# Altium PCB KZ-EC06-LED-V1.2.PcbDoc
Units mm, origin at the board's own origin, x right, y up, seen from the top; angles counter-clockwise.
Board outline 130 x 130 mm, 2 copper layers (Top Layer, Bottom Layer), stack 1.569 mm thick; 41 components, 40 nets, 122 pads, 372 vias.
Unrouted connection lines stored in the file: 1.
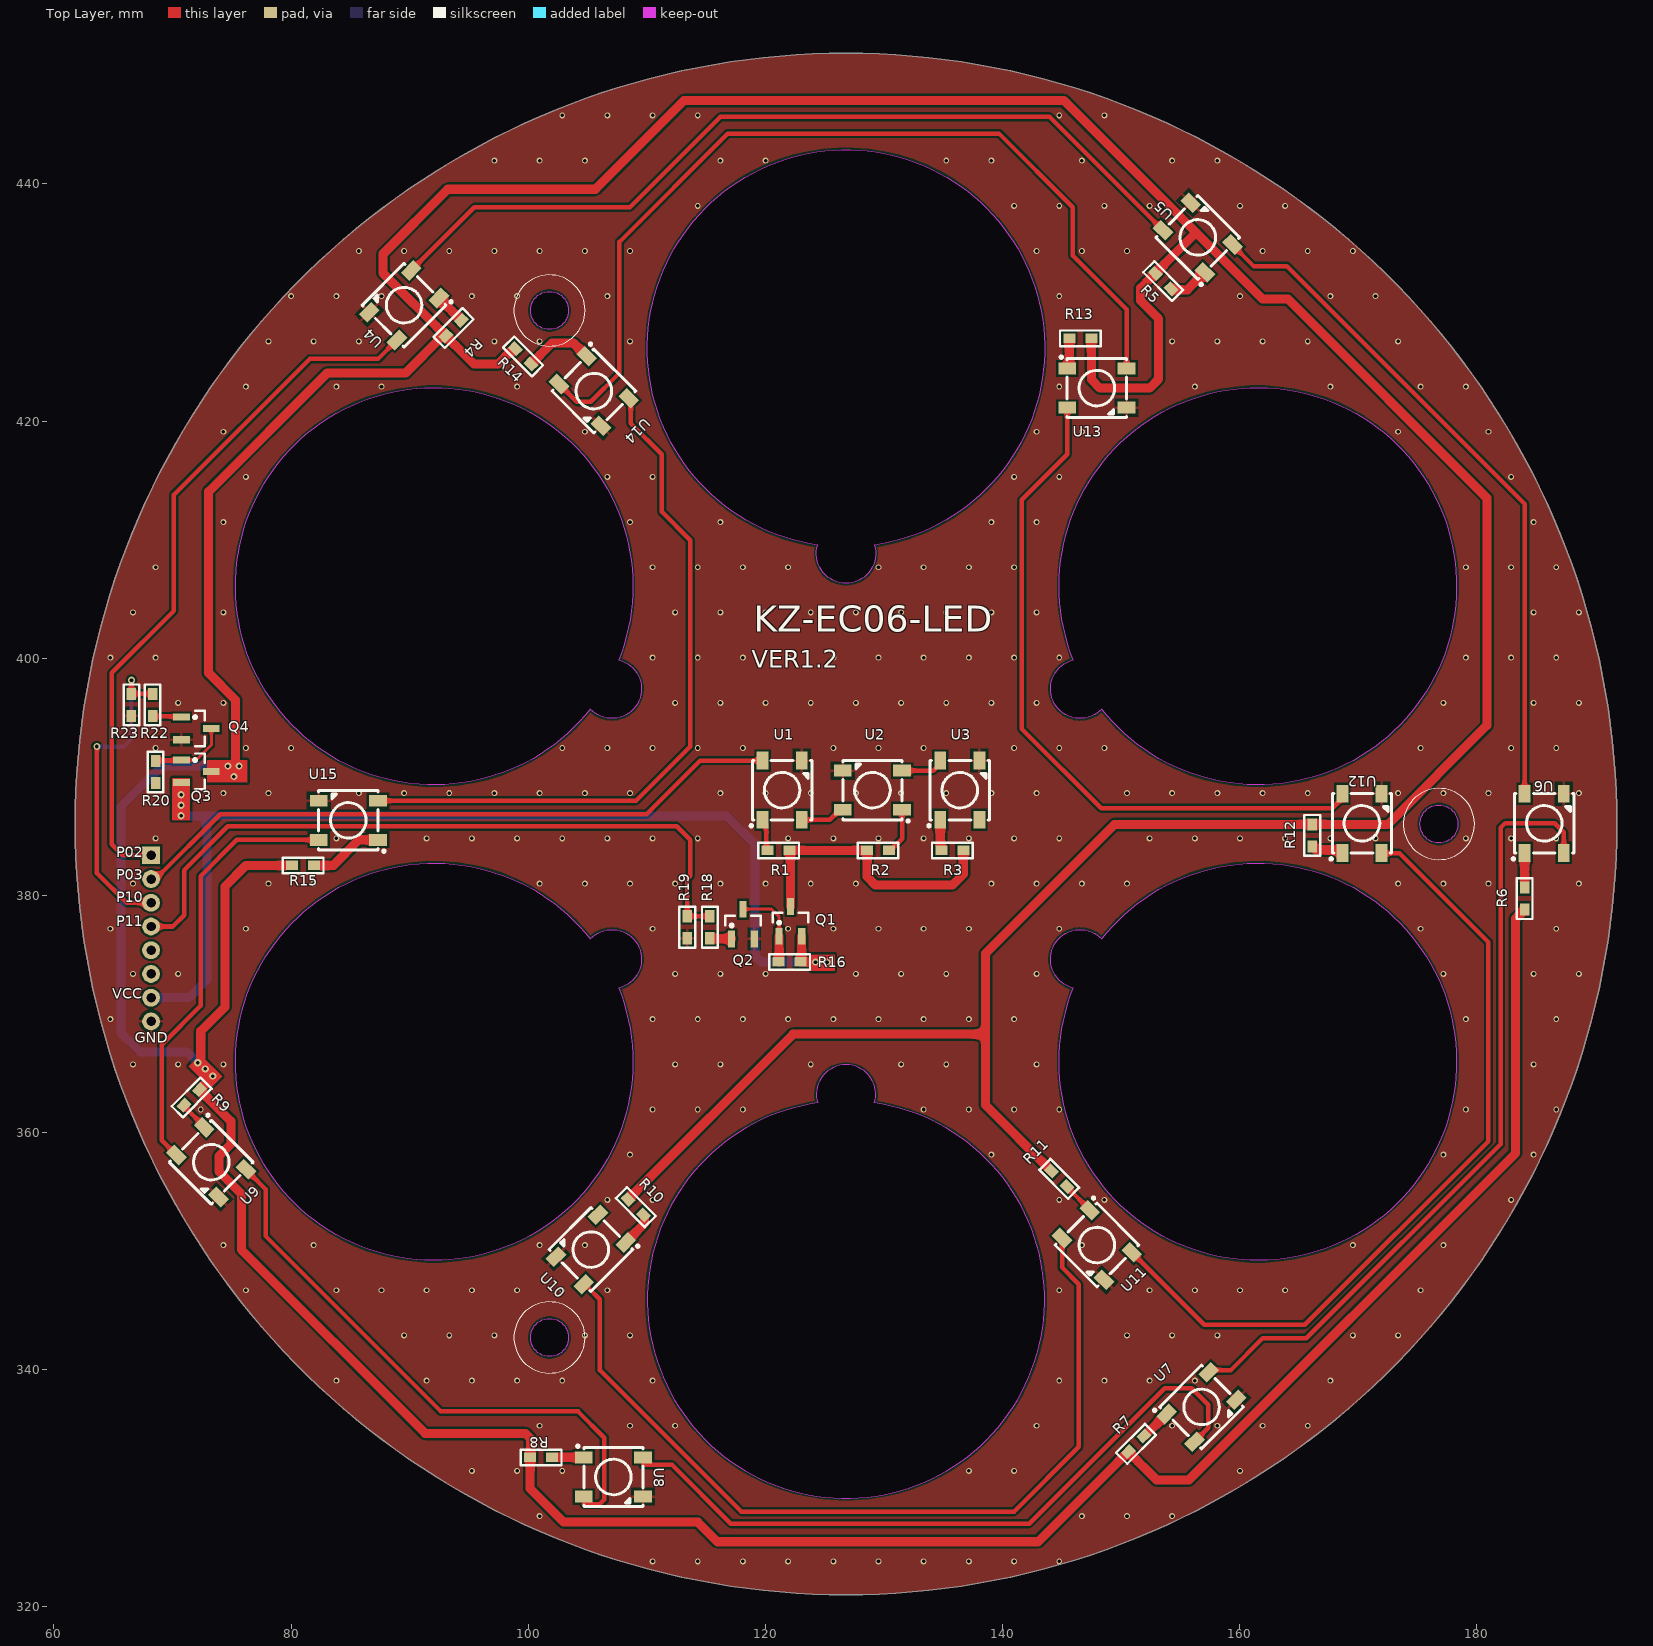
[diagram p0: Top Layer view]
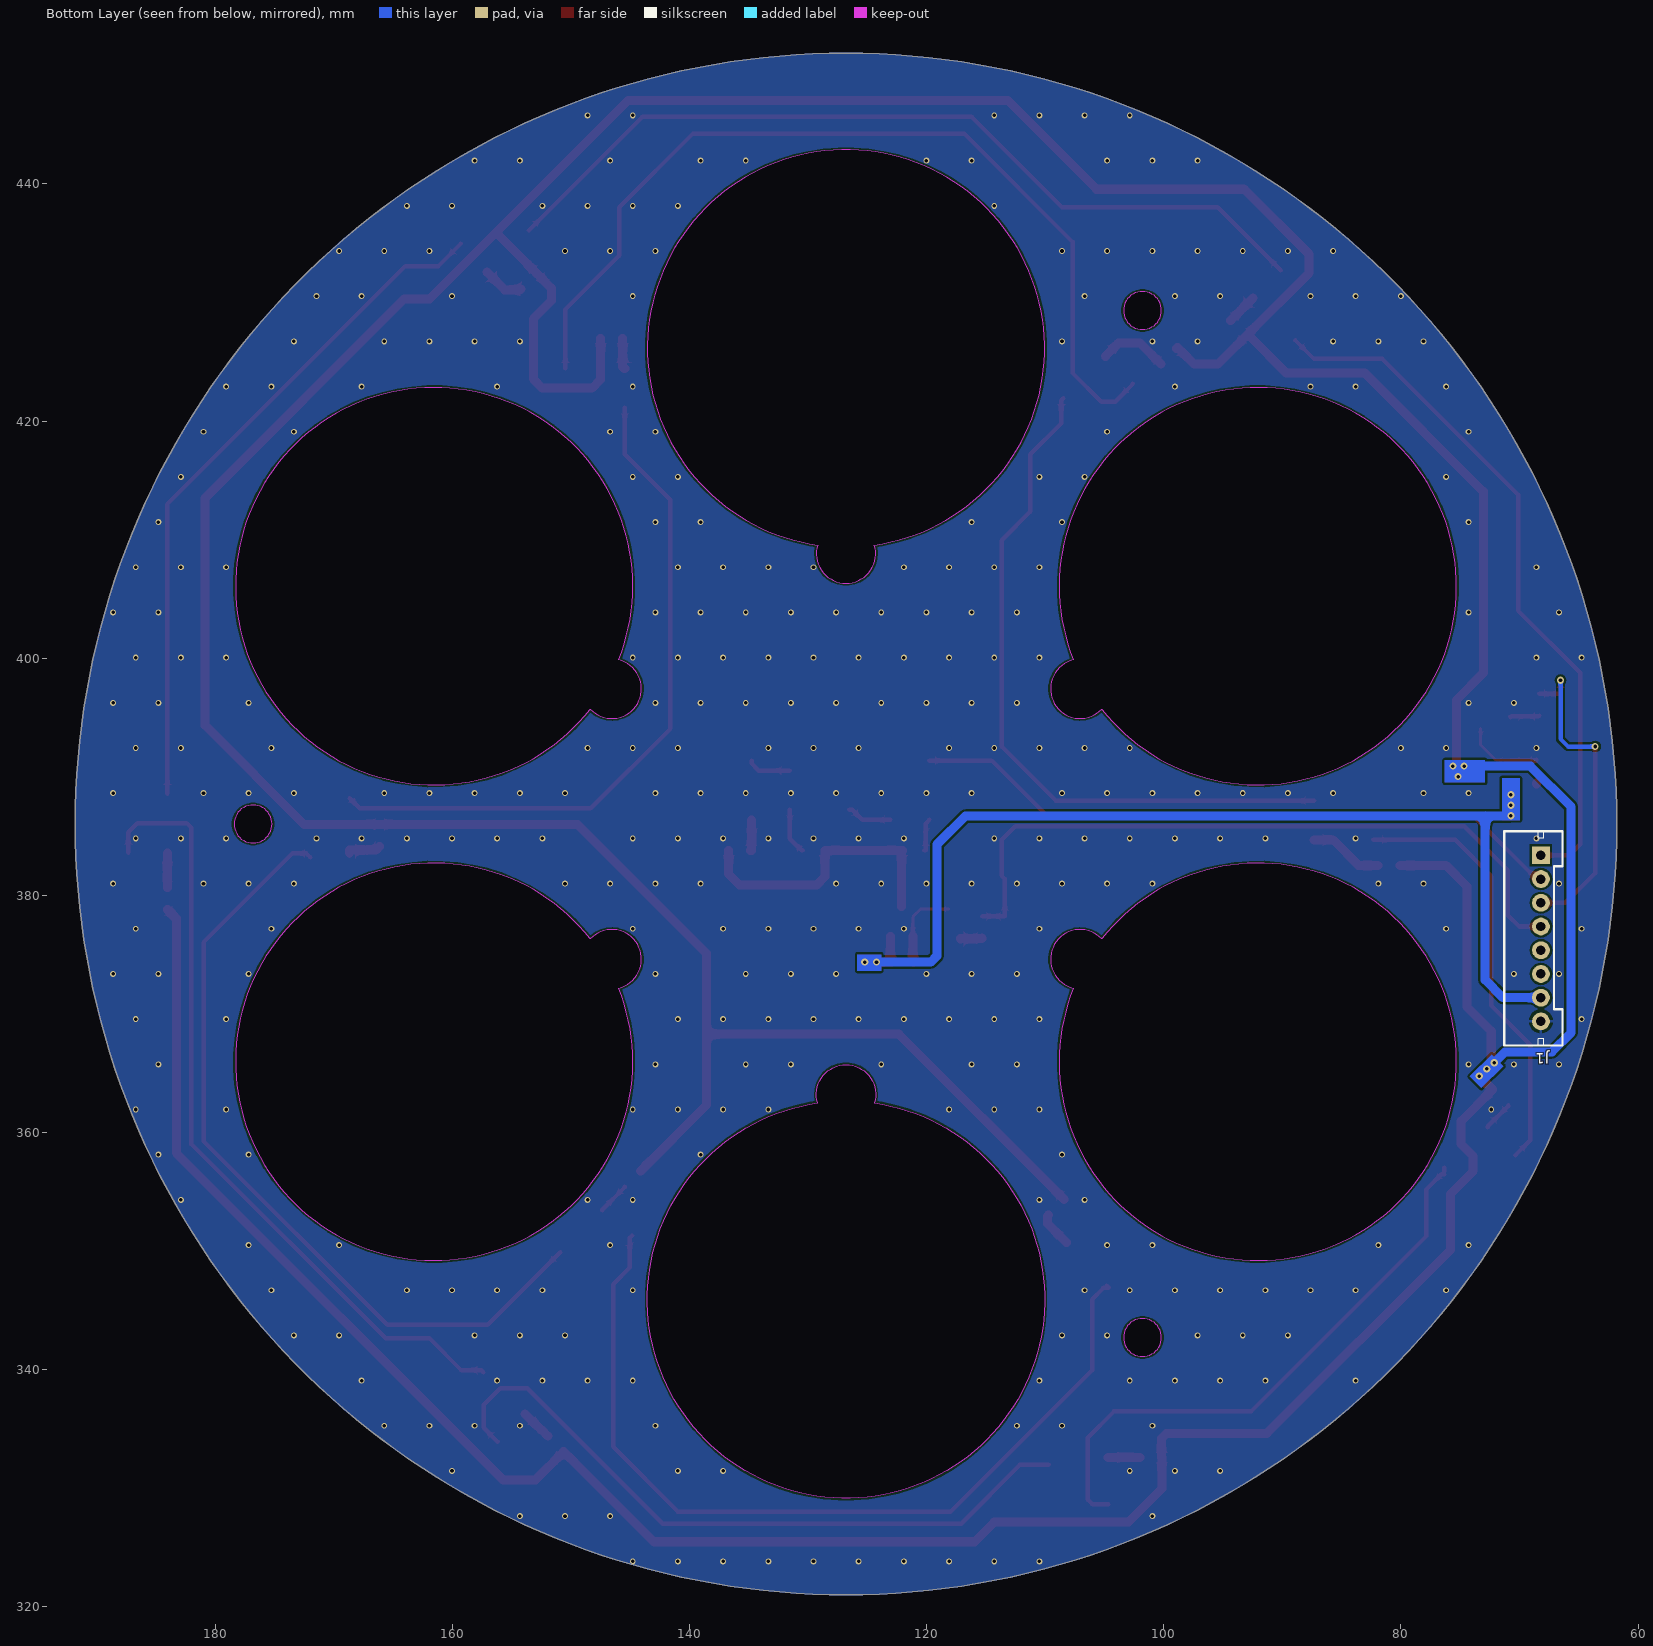
[diagram p1: Bottom Layer view, seen from below]
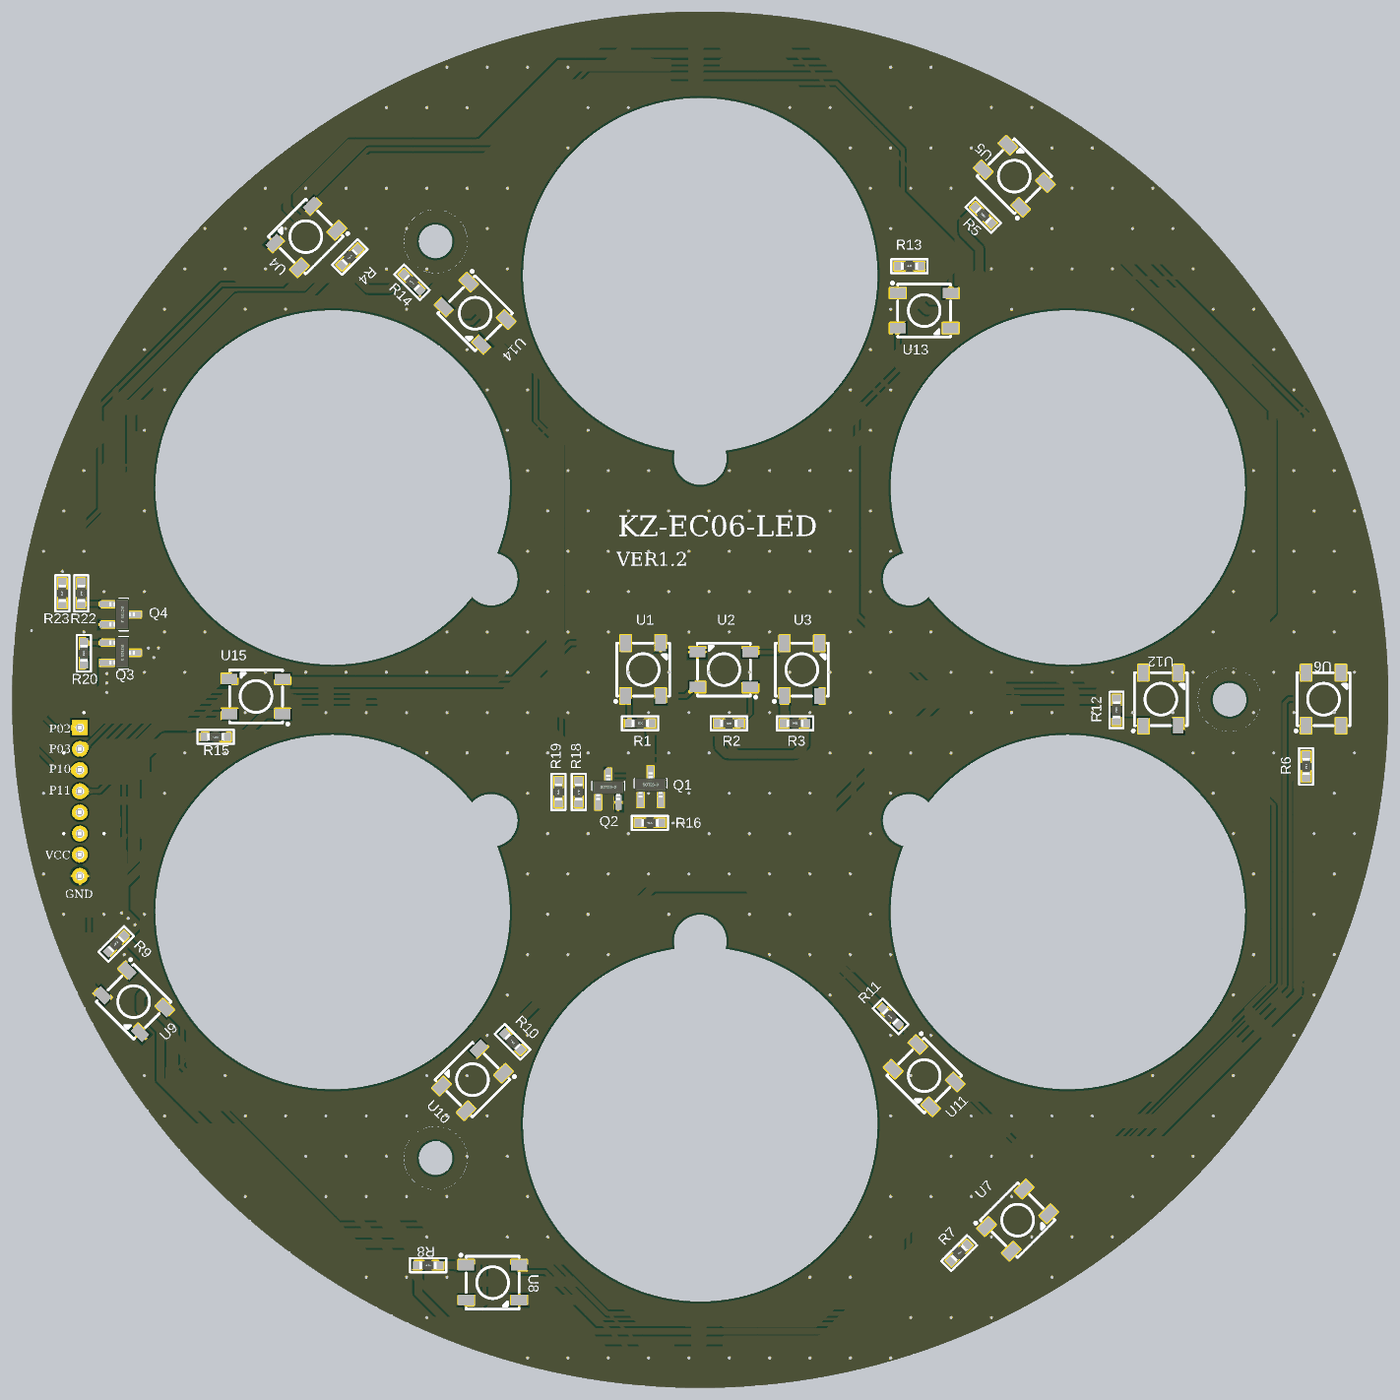
[diagram p2: 3D render of the assembled board from above, using the file's embedded part models]

## Layer stack, top to bottom
Top Solder: solder mask 0.0254, SM-001, Dk 4
Top Layer: signal copper 0.035
Dielectric 1: core 1.4986, Core-043, Dk 4.3
Bottom Layer: signal copper 0.035
Bottom Solder: solder mask 0.0254, SM-001, Dk 4

## Board outline
126.799,321.023 cw(c126.799,386.023) 61.799,386.023 cw(c126.799,386.023) 126.799,451.023 cw(c126.799,386.023) 191.799,386.023 cw(c126.799,386.023)
cut-out: 101.799,427.724 cw(c101.799,429.324) 100.199,429.324 cw(c101.799,429.324) 101.799,430.924 cw(c101.799,429.324) 103.399,429.324 cw(c101.799,429.324)
cut-out: 100.199,342.722 cw(c101.799,342.722) 101.799,344.322 cw(c101.799,342.722) 103.399,342.722 cw(c101.799,342.722) 101.799,341.122 cw(c101.799,342.722)
cut-out: 176.799,384.423 cw(c176.799,386.023) 175.199,386.023 cw(c176.799,386.023) 176.799,387.623 cw(c176.799,386.023) 178.399,386.023 cw(c176.799,386.023)
cut-out: 107.625,372.189 cw(c92.071,365.973) 105.232,376.335 cw(c107.053,374.623)
cut-out: 105.232,395.711 cw(c92.071,406.073) 107.625,399.857 cw(c107.053,397.423)
cut-out: 124.405,409.545 cw(c126.799,426.123) 129.192,409.545 cw(c126.799,408.823)
cut-out: 148.366,395.711 cw(c146.544,397.423) 145.973,399.857 cw(c161.526,406.073)
cut-out: 145.973,372.189 cw(c146.544,374.623) 148.366,376.335 cw(c161.526,365.973)
cut-out: 124.405,362.501 ccw(c126.799,345.923) 129.192,362.501 ccw(c126.799,363.223)

## Design rules (kind name [scope] priority, off if disabled: settings)
Clearance [All] p1: gap=0.178 ignorepadtopadclearanceinfootprint=FALSE
HoleToHoleClearance [All] p1: gap=0 allowstackedmicrovias=TRUE
MinimumSolderMaskSliver [All] p1: minsoldermaskwidth=0
PlaneConnect [All] p1: pad.planeconnectstyle=Relief pad.reliefexpansion=0.508 pad.reliefentries=4 pad.reliefconductorwidth=0.254 pad.reliefairgap=0.254 via.planeconnectstyle=Direct via.reliefexpansion=0.508 via.reliefentries=4 via.reliefconductorwidth=0.254 via.reliefairgap=0.254
PolygonConnect [All] p1: thpad.connectstyle=Relief thpad.reliefconductorwidth=0.254 thpad.reliefentries=4 thpad.polygonreliefangle="90 Angle" thpad.airgapwidth=0.254 smdpad.connectstyle=Relief smdpad.reliefconductorwidth=0.254 smdpad.reliefentries=4 smdpad.polygonreliefangle="90 Angle" smdpad.airgapwidth=0.254 via.connectstyle=Direct via.reliefconductorwidth=0.254 via.reliefentries=4 via.polygonreliefangle="90 Angle" via.airgapwidth=0.254
RoutingVias [All] p1: holewidth=0.711 width=1.27 viastyle="Through Hole" minholewidth=0.711 minwidth=1.27 maxholewidth=0.711 maxwidth=1.27
SilkToSilkClearance [All] p1: silktosilkclearance=0
SilkToSolderMaskClearance [IsPad] p1: minsilkscreentomaskgap=0 clearancetoexposedcopper=TRUE
SolderMaskExpansion [All] p1: expansion=0.102 istentingtop=FALSE
Width [All] p1: maxlimit=1.524 minlimit=0.254 preferedwidth=0.254
25 further rules are at their usual default settings.

## Components (designator, comment, footprint, x,y, rotation, side; value= is the part's Value field where it differs from the comment)
J1 "PH2.0-8P" PH2.0-8P 68.199,383.38 r270 bottom
Q1 "P-MOS" SOT23 121.163,376.555 r0 top
Q2 "2302 NMOS" SOT23 117.16,376.327 r0 top
Q3 "P-MOS" SOT23 70.765,391.414 r270 top
Q4 "2302 NMOS" SOT23 70.765,395.031 r270 top
R1 "240R 0603" "R 0603" 121.12,383.794 r0 top
R2 "240R 0603" "R 0603" 129.502,383.794 r180 top
R3 "240R 0603" "R 0603" 135.763,383.794 r0 top
R4 "240R 0603" "R 0603" 93.705,427.842 r225 top
R5 "240R 0603" "R 0603" 153.543,431.8 r135 top
R6 "240R 0603" "R 0603" 184.023,379.73 r270 top
R7 "240R 0603" "R 0603" 151.257,333.756 r225 top
R8 "240R 0603" "R 0603" 101.092,332.613 r180 top
R9 "240R 0603" "R 0603" 71.628,362.966 r45 top
R10 "240R 0603" "R 0603" 109.072,353.716 r135 top
R11 "240R 0603" "R 0603" 144.78,356.108 r135 top
R12 "240R 0603" "R 0603" 166.116,385.064 r90 top
R13 "240R 0603" "R 0603" 146.558,426.974 r0 top
R14 "240R 0603" "R 0603" 99.568,425.45 r135 top
R15 "240R 0603" "R 0603" 81.026,382.524 r180 top
R16 "10K" "R 0603" 122.047,374.396 r0 top
R18 "100K 0402 5%" "R 0603" 115.316,377.317 r270 top
R19 "100K 0402 5%/NC" "R 0603" 113.411,377.317 r90 top
R20 "10K" "R 0603" 68.58,390.414 r270 top
R22 "100K 0402 5%" "R 0603" 68.326,396.075 r270 top
R23 "100K 0402 5%/NC" "R 0603" 66.548,396.075 r90 top
U1 "LED-IC" LED-SMD_4P-L5.0-W5.0-BL_TC5050RGB 121.412,388.874 r90 top
U2 "LED-IC" LED-SMD_4P-L5.0-W5.0-BL_TC5050RGB 129.032,388.874 r180 top
U3 "LED-IC" LED-SMD_4P-L5.0-W5.0-BL_TC5050RGB 136.398,388.874 r90 top
U4 "LED-IC" LED-SMD_4P-L5.0-W5.0-BL_TC5050RGB 89.535,429.768 r225 top
U5 "LED-IC" LED-SMD_4P-L5.0-W5.0-BL_TC5050RGB 156.464,435.483 r135 top
U6 "LED-IC" LED-SMD_4P-L5.0-W5.0-BL_TC5050RGB 185.674,386.08 r90 top
U7 "LED-IC" LED-SMD_4P-L5.0-W5.0-BL_TC5050RGB 156.781,336.868 r45 top
U8 "LED-IC" LED-SMD_4P-L5.0-W5.0-BL_TC5050RGB 107.188,330.962 r0 top
U9 "LED-IC" LED-SMD_4P-L5.0-W5.0-BL_TC5050RGB 73.279,357.505 r315 top
U10 "LED-IC" LED-SMD_4P-L5.0-W5.0-BL_TC5050RGB 105.283,350.139 r225 top
U11 "LED-IC" LED-SMD_4P-L5.0-W5.0-BL_TC5050RGB 147.955,350.52 r315 top
U12 "LED-IC" LED-SMD_4P-L5.0-W5.0-BL_TC5050RGB 170.307,386.08 r90 top
U13 "LED-IC" LED-SMD_4P-L5.0-W5.0-BL_TC5050RGB 147.955,422.783 r0 top
U14 "LED-IC" LED-SMD_4P-L5.0-W5.0-BL_TC5050RGB 105.537,422.529 r315 top
U15 "LED-IC" LED-SMD_4P-L5.0-W5.0-BL_TC5050RGB 84.836,386.334 r180 top

## Footprints (in the part's own frame and the unit in brackets; to place one, negate y for a bottom-side part, rotate by r counter-clockwise, add the part's x,y. Pads: shape width x height; smd on the part's side, far side on the other; paste and mask are expansions set on the pad)
LED-SMD_4P-L5.0-W5.0-BL_TC5050RGB [mm]
  rect 1.5x1 smd: 1(-2.5,1.65) 2(-2.5,-1.65) 3(2.5,-1.65) 4(2.5,1.65)
  silkscreen extent -3.1,-2.5 2.5,2.7
PH2.0-8P [mm]
  rect 1.5x1.5 hole 0.8: 1(0,0)
  round 1.5 hole 0.8: 2(2,0) 3(4,0) 4(6,0) 5(8,0) 6(10,0) 7(12,0) 8(14,0)
  silkscreen extent -2.03,-3.08 16.03,1.82, body extent -1.96,-2.99 15.94,1.71, height 6.01
"R 0603" [mil] "1/10W贴片电阻"
  rect 40x31.5 smd: 1(-36.5,0) 2(36.5,0)
  silkscreen extent -68,-26 68,26, body extent -31,-16 32,16, height 16
SOT23 [mm]
  rect 0.6x1.4 smd: D(0.95,2.514) G(0,0) S(1.9,0)
  silkscreen extent -0.55,1.02 2.45,1.97, body extent -0.56,0.22 2.44,2.62, height 1.05

## Part data
Q1 Q3: "P沟道场效应管"
Q2 Q4: library part N-MOS, "N沟道场效应管"
R1 R2 R3 R4 R5 R6 R7 R8 R9 R10 R11 R12 R13 R14 R15 R16 R18 R19 R20 R22 R23: library part R, "贴片电阻", BOM名称=贴片电阻, 学习资源=www.ooocke.com, 版权归属=源创客
U1 U2 U3 U4 U5 U6 U7 U8 U9 U10 U11 U12 U13 U14 U15: library part TC5050RGB

## Via types
v1: diameter 0.5, hole 0.3, Top Layer to Bottom Layer, tented both sides, 359 vias
v2: diameter 0.6, hole 0.3, Top Layer to Bottom Layer, tented both sides, 13 vias

## Nets (pads, with @x,y where several pads share a name; then routed paths per layer and width w, separated by ;. In a path a pad name is that pad's centre, name@x,y a point inside that pad or via, vN(x,y) a via of type N, cw(c..) or ccw(c..) an arc to the next point about the centre after c; other vN are vias at no path point)
GND: J1.8 Q2.S Q4.S R19.1 R23.1 U1.3 U2.3 U3.3 U4.3 U5.3 U6.3 U7.3 U8.3 U9.3 U10.3 U11.3 U12.3 U13.3 U14.3 U15.3
  other v1: 110.49,323.85 114.3,323.85 118.11,323.85 121.92,323.85 125.73,323.85 129.54,323.85 133.35,323.85 137.16,323.85 140.97,323.85 144.78,323.85 100.965,327.66 146.685,327.66 150.495,327.66 154.305,327.66 95.25,331.47 99.06,331.47 102.87,331.47 137.16,331.47 140.97,331.47 160.02,331.47 100.965,335.28 108.585,335.28 112.395,335.28 142.875,335.28 154.305,335.28 158.115,335.28 161.925,335.28 165.735,335.28 83.82,339.09 91.44,339.09 95.25,339.09 99.06,339.09 102.87,339.09 110.49,339.09 144.78,339.09 148.59,339.09 152.4,339.09 156.21,339.09 167.64,339.09 89.535,342.9 93.345,342.9 97.155,342.9 104.775,342.9 108.585,342.9 150.495,342.9 154.305,342.9 158.115,342.9 169.545,342.9 173.355,342.9 76.2,346.71 83.82,346.71 87.63,346.71 91.44,346.71 95.25,346.71 99.06,346.71 102.87,346.71 106.68,346.71 144.78,346.71 152.4,346.71 156.21,346.71 160.02,346.71 163.83,346.71 175.26,346.71 74.295,350.52 81.915,350.52 100.965,350.52 104.775,350.52 146.685,350.52 169.545,350.52 177.165,350.52 106.68,354.33 110.49,354.33 144.78,354.33 148.59,354.33 182.88,354.33 108.585,358.14 139.065,358.14 177.165,358.14 184.785,358.14 72.39,361.95 110.49,361.95 114.3,361.95 118.11,361.95 133.35,361.95 137.16,361.95 140.97,361.95 144.78,361.95 179.07,361.95 186.69,361.95 66.675,365.76 70.485,365.76 74.295,365.76 112.395,365.76 116.205,365.76 123.825,365.76 131.445,365.76 135.255,365.76 142.875,365.76 184.785,365.76 64.77,369.57 110.49,369.57 114.3,369.57 118.11,369.57 121.92,369.57 125.73,369.57 129.54,369.57 133.35,369.57 137.16,369.57 140.97,369.57 179.07,369.57 186.69,369.57 66.675,373.38 70.485,373.38 112.395,373.38 116.205,373.38 120.015,373.38 127.635,373.38 131.445,373.38 135.255,373.38 142.875,373.38 177.165,373.38 184.785,373.38 188.595,373.38 64.77,377.19 76.2,377.19 110.49,377.19 121.92,377.19 125.73,377.19 129.54,377.19 133.35,377.19 137.16,377.19 144.78,377.19 175.26,377.19 186.69,377.19 66.675,381 78.105,381 81.915,381 100.965,381 104.775,381 108.585,381 112.395,381 116.205,381 120.015,381 123.825,381 127.635,381 139.065,381 142.875,381 146.685,381 150.495,381 173.355,381 177.165,381 180.975,381 188.595,381 68.58,384.81 83.82,384.81 91.44,384.81 95.25,384.81 99.06,384.81 102.87,384.81 106.68,384.81 110.49,384.81 114.3,384.81 121.92,384.81 125.73,384.81 129.54,384.81 133.35,384.81 137.16,384.81 140.97,384.81 144.78,384.81 152.4,384.81 156.21,384.81 160.02,384.81 163.83,384.81 167.64,384.81 171.45,384.81 179.07,384.81 182.88,384.81 186.69,384.81 74.295,388.62 78.105,388.62 85.725,388.62 89.535,388.62 93.345,388.62 97.155,388.62 100.965,388.62 104.775,388.62 108.585,388.62 116.205,388.62 120.015,388.62 123.825,388.62 127.635,388.62 131.445,388.62 135.255,388.62 139.065,388.62 142.875,388.62 150.495,388.62 154.305,388.62 158.115,388.62 161.925,388.62 165.735,388.62 173.355,388.62 177.165,388.62 180.975,388.62 188.595,388.62 68.58,392.43 76.2,392.43 80.01,392.43 102.87,392.43 106.68,392.43 110.49,392.43 114.3,392.43 118.11,392.43 125.73,392.43 129.54,392.43 133.35,392.43 140.97,392.43 144.78,392.43 148.59,392.43 175.26,392.43 182.88,392.43 186.69,392.43 70.485,396.24 74.295,396.24 112.395,396.24 116.205,396.24 120.015,396.24 123.825,396.24 127.635,396.24 131.445,396.24 135.255,396.24 139.065,396.24 142.875,396.24 177.165,396.24 184.785,396.24 188.595,396.24 64.77,400.05 68.58,400.05 110.49,400.05 114.3,400.05 118.11,400.05 121.92,400.05 125.73,400.05 129.54,400.05 133.35,400.05 137.16,400.05 140.97,400.05 144.78,400.05 179.07,400.05 182.88,400.05 186.69,400.05 66.675,403.86 74.295,403.86 112.395,403.86 116.205,403.86 120.015,403.86 123.825,403.86 127.635,403.86 131.445,403.86 135.255,403.86 139.065,403.86 142.875,403.86 184.785,403.86 188.595,403.86 68.58,407.67 110.49,407.67 114.3,407.67 118.11,407.67 121.92,407.67 129.54,407.67 133.35,407.67 137.16,407.67 140.97,407.67 179.07,407.67 182.88,407.67 186.69,407.67 74.295,411.48 108.585,411.48 116.205,411.48 139.065,411.48 142.875,411.48 184.785,411.48 76.2,415.29 106.68,415.29 110.49,415.29 140.97,415.29 144.78,415.29 182.88,415.29 74.295,419.1 104.775,419.1 142.875,419.1 146.685,419.1 173.355,419.1 180.975,419.1 76.2,422.91 83.82,422.91 87.63,422.91 99.06,422.91 144.78,422.91 156.21,422.91 167.64,422.91 175.26,422.91 179.07,422.91 78.105,426.72 81.915,426.72 85.725,426.72 97.155,426.72 100.965,426.72 108.585,426.72 154.305,426.72 158.115,426.72 161.925,426.72 165.735,426.72 173.355,426.72 80.01,430.53 83.82,430.53 87.63,430.53 95.25,430.53 99.06,430.53 106.68,430.53 144.78,430.53 160.02,430.53 167.64,430.53 171.45,430.53 85.725,434.34 89.535,434.34 93.345,434.34 97.155,434.34 100.965,434.34 104.775,434.34 108.585,434.34 142.875,434.34 146.685,434.34 150.495,434.34 161.925,434.34 165.735,434.34 169.545,434.34 114.3,438.15 140.97,438.15 144.78,438.15 148.59,438.15 152.4,438.15 160.02,438.15 163.83,438.15 97.155,441.96 100.965,441.96 104.775,441.96 116.205,441.96 120.015,441.96 135.255,441.96 139.065,441.96 146.685,441.96 154.305,441.96 158.115,441.96 102.87,445.77 106.68,445.77 110.49,445.77 114.3,445.77 144.78,445.77 148.59,445.77
NetQ1_G: Q1.G Q2.D R16.1 | length 7.2
  Top Layer w0.254: Q2.D 120.523,378.841 121.163,378.201 Q1.G
  Top Layer w0.762: R16.1 121.144,374.396 121.163,374.415 Q1.G
NetQ2_G: Q2.G R18.2 | length 1.9
  Top Layer w0.762: R18.2 115.316,376.377 115.335,376.358 117.128,376.358 Q2.G
NetQ3_G: Q3.G Q4.D R20.1 | length 6.8
  Top Layer w0.254: Q3.G 72.009,391.414 73.279,392.684 Q4.D
  Top Layer w0.381: R20.1@68.58,391.449 R20.1 68.616,391.377 70.729,391.377 Q3.G
NetQ4_G: Q4.G R22.2 | length 2.5
  Top Layer w0.381: R22.2 68.384,395.089 70.707,395.089 Q4.G Q4.G@70.79,395.056
NetR1_1: R1.1 U1.1 | length 2.8
  Top Layer w0.381: U1.1 120.085,386.051 120.085,383.794 R1.1
NetR2_1: R2.1 U2.1 | length 4
  Top Layer w0.381: R2.1 130.537,383.794 131.532,384.789 U2.1
NetR3_1: R3.1 U3.1 | length 2.7
  Top Layer w0.762: U3.1 134.748,383.813 134.767,383.794 R3.1
NetR4_1: R4.1 U4.1 | length 2.8
  Top Layer w0.381: R4.1 R4.1@94.528,428.498
  Top Layer w0.762: U4.1 92.48,430.369 94.351,428.498 R4.1
NetR5_1: R5.1 U5.1 | length 3.5
  Top Layer w0.762: R5.1 154.275,431.068 155.585,431.068 U5.1
NetR6_1: R6.1 U6.1 | length 2.9
  Top Layer w0.762: R6.1 U6.1
NetR7_1: R7.1 U7.1 | length 2.7
  Top Layer w0.762: R7.1 151.939,334.412 152.456,334.928 152.508,334.928 U7.1
NetR8_1: R8.1 U8.1 | length 2.7
  Top Layer w0.762: R8.1 U8.1
NetR9_1: R9.1 U9.1 | length 2.6
  Top Layer w0.381: R9.1 70.972,362.228 72.678,360.522 U9.1
NetR10_1: R10.1 U10.1 | length 3
  Top Layer w0.762: U10.1 109.804,352.327 109.804,352.984 R10.1
NetR11_1: R11.1 U11.1 | length 2.8
  Top Layer w0.381: R11.1 145.436,355.413 147.354,353.494 U11.1
NetR12_1: R12.1 U12.1 | length 3.2
  Top Layer w0.381: U12.1@168.657,383.33 U12.1
  Top Layer w0.762: R12.1 166.423,383.83 168.657,383.83 U12.1
NetR13_1: R13.1 U13.1 | length 2.6
  Top Layer w0.762: U13.1 145.512,424.433 145.631,424.552 R13.1
NetR14_1: R14.1 U14.1 | length 5.9
  Top Layer w0.762: R14.1 102.022,426.593 103.806,426.593 U14.1
NetR15_1: R15.1 U15.1 | length 6.3
  Top Layer w0.762: R15.1 83.566,382.524 85.726,384.684 U15.1
NetU1_2: U1.2 U2.4 | length 3.8
  Top Layer w0.381: U1.2 125.432,386.374 126.282,387.224 U2.4
NetU2_2: U2.2 U3.4 | length 3.7
  Top Layer w0.381: U2.2 134.148,390.524 134.748,391.124 U3.4
NetU4_2: U4.2 U5.4 | length 72.7
  Top Layer w0.381: U4.2 95.457,438.023 108.585,438.023 116.205,445.643 143.971,445.643 U5.4
NetU5_2: U5.2 U6.4 | length 58.2
  Top Layer w0.381: U5.2@159.301,434.932 161.163,433.07 163.957,433.07 184.024,413.003 U6.4
NetU6_2: U6.2 U7.4 | length 66.8
  Top Layer w0.381: U7.4 157.559,339.979 159.258,339.979 161.925,342.646 165.608,342.646 181.991,359.029 181.991,385.699 182.372,386.08 186.563,386.08 187.324,385.319 U6.2
NetU7_2: U7.2 U8.4 | length 58.6
  Top Layer w0.381: 109.688,331.977 112.142,331.977 117.094,327.025 142.24,327.025 153.67,338.455 155.956,338.455 157.353,337.058 157.353,335.106 U7.2
NetU8_2: U8.2 U9.4 | length 49
  Top Layer w0.381: U9.4@76.34,356.476 76.594,356.476 77.851,355.219 77.851,351.282 92.647,336.486 104.203,336.486 106.426,334.264 106.426,329.057 106.046,328.677 104.688,328.677 ; U9.4@76.34,356.73 U9.4@76.34,357.031
NetU9_2: U9.2 U15.4 | length 36.6
  Top Layer w0.381: U9.2 69.088,359.363 69.088,367.411 72.39,370.713 72.39,381.635 75.439,384.684 U15.4
NetU10_4: U10.4 U11.2 | length 74.1
  Top Layer w0.381: U10.4@104.809,347.078 104.632,346.901 105.092,346.901 106.045,345.948 106.045,339.979 117.983,328.041 140.97,328.041 146.431,333.502 146.431,347.218 145.02,348.629 U11.2 U11.2@144.844,351.298
NetU11_4: U11.4 U12.2 | length 68.1
  Top Layer w0.381: U11.4 157.019,343.789 165.481,343.789 180.975,359.283 180.975,376.047 173.482,383.54 172.298,383.54 U12.2@171.957,383.199
NetU12_4: U12.4 U13.2 | length 58.8
  Top Layer w0.381: U13.2 145.455,417.187 141.623,413.355 141.623,394.038 148.311,387.35 167.808,387.35 U12.4@168.657,388.199
NetU13_4: U13.4 U14.2 | length 77.8
  Top Layer w0.381: U14.2 104.093,421.64 105.283,421.64 107.696,424.053 107.696,435.102 116.84,444.246 139.7,444.246 145.923,438.023 145.923,433.959 150.455,429.427 U13.4
NetU14_4: U14.4 U15.2 | length 59.7
  Top Layer w0.381: U15.2 109.092,387.984 113.665,392.557 113.665,409.956 111.252,412.369 111.252,417.195 108.648,419.799 108.648,421.751 U14.4
P02: J1.1 U4.4 | length 59.5
  Top Layer w0.381: J1.1 65.819,383.38 64.897,384.302 64.897,398.78 70.104,403.987 70.104,413.766 81.574,425.236 87.336,425.236 U4.4
P03: J1.2 U1.4 | length 55.7
  Top Layer w0.381: J1.2 68.579,381.38 74.041,386.842 109.982,386.842 114.514,391.374 U1.4
P10: J1.3 R22.1 R23.2 | length 27.3
  Top Layer w0.381: v2(63.627,392.557) 63.627,381.889 66.136,379.38 J1.3 ; v2(66.548,398.145) R23.2 R22.1
  Bottom Layer w0.381: v2(63.627,392.557) 65.913,392.557 66.548,393.192 v2(66.548,398.145)
P11: J1.4 R18.1 R19.2 | length 60.1
  Top Layer w0.381: J1.4 70.04,377.38 70.993,378.333 70.993,382.143 74.676,385.826 112.522,385.826 113.665,384.683 113.665,381.645 113.411,381.391 R19.2 R18.1
VBAT-1: Q1.D R1.2 R2.2 R3.2 | length 24.3
  Top Layer w0.762: R1.2 R1.2@122.094,383.794 ; Q1.D 122.113,383.775 R1.2@122.094,383.794 ; R3.2 136.69,381.8 135.763,380.873 129.286,380.873 128.575,381.584 R2.2 R1.2@122.094,383.794
VBAT-2: Q3.D R4.2 R5.2 R6.2 R7.2 R8.2 R9.2 R10.2 R11.2 R12.2 R13.2 R14.2 R15.2 | length 563.8
  Top Layer w0.762: v2(72.771,365.379) 72.39,365.76 72.39,368.554 74.422,370.586 74.422,380.746 76.2,382.524 R15.2 ; v2(73.406,364.771) 72.284,363.648 R9.2 74.93,360.975 74.93,359.029 73.914,358.013 73.914,356.743 75.819,354.838 75.819,350.139 91.313,334.645 99.757,334.645 100.203,334.199 100.203,332.632 100.184,332.613 R8.2 100.165,329.984 102.997,327.152 114.3,327.152 115.951,325.501 143.002,325.501 R7.2 152.994,330.708 155.702,330.708 183.261,358.267 183.261,378.041 R6.2 ; 75.311,391.033 75.311,396.494 73.05,398.755 73.05,414.045 83.058,424.053 89.662,424.053 92.72,427.111 92.974,427.111 R4.2 ; R14.2 98.836,426.182 97.469,424.815 95.422,424.815 R4.2 ; R10.2 122.346,368.3 138.557,368.3 ; R11.2 138.557,362.331 138.557,368.3 ; R13.2 147.485,423.507 148.209,422.783 152.4,422.783 153.162,423.545 153.162,428.625 151.638,430.149 151.638,431.206 R5.2 156.253,435.821 ; R4.2 87.757,432.48 87.757,434.086 93.218,439.547 105.664,439.547 113.157,447.04 145.161,447.04 161.925,430.276 164.084,430.276 180.848,413.512 180.848,394.335 172.504,385.991 R12.2 149.455,385.991 138.557,375.093 138.557,368.3
  Bottom Layer w0.762: v2(72.136,365.887) 71.219,366.804 67.282,366.804 65.659,368.427 65.659,384.556 65.659,387.477 69.088,390.906 v2(74.676,390.906) ; v2@72.995,365.182 v2(73.406,364.771) ; v2@75.057,390.017 75.501,390.462
  other v2: 75.184,390.017 75.629,390.906
VBAT-VCC: J1.7 Q1.S Q3.S R16.2 R20.2 | length 87.9
  Top Layer w0.762: R20.2@68.58,389.379 R20.2 ; Q1.S 123.063,374.415 123.044,374.396 R16.2 122.993,374.377 v2(124.225,374.377)
  Bottom Layer w0.762: J1.7 71.406,371.38 72.898,372.872 72.898,386.715 ; v2(70.739,386.715) 72.898,386.715 ; v2(125.222,374.377) 119.653,374.377 119.126,374.904 119.126,384.302 116.713,386.715 72.898,386.715
  other v2: 70.739,387.604 70.739,388.493
pads on no net: J1.5 J1.6 U3.2 U10.2

## Polygon pours and split planes (outlines as drawn)
GND on Bottom Layer "GND_L02_P003" (solid, remove dead copper, pour order 3): 126.799,321.023 cw(c126.799,386.023) 61.799,386.023 cw(c126.799,386.023) 126.799,451.023 cw(c126.799,386.023) 191.799,386.023 cw(c126.799,386.023)
GND on Bottom Layer "NONET_L02_P001" (solid, remove dead copper, shelved, pour order 1): 126.799,321.023 cw(c126.799,386.023) 61.799,386.023 cw(c126.799,386.023) 126.799,451.023 cw(c126.799,386.023) 191.799,386.023 cw(c126.799,386.023)
GND on Top Layer "GND_L01_P002" (solid, remove dead copper, pour order 2): 126.799,321.023 cw(c126.799,386.023) 61.799,386.023 cw(c126.799,386.023) 126.799,451.023 cw(c126.799,386.023) 191.799,386.023 cw(c126.799,386.023)
GND on Top Layer "NONET_L01_P000" (solid, remove dead copper, shelved, pour order 0): 126.799,321.023 cw(c126.799,386.023) 61.799,386.023 cw(c126.799,386.023) 126.799,451.023 cw(c126.799,386.023) 191.799,386.023 cw(c126.799,386.023)

## Other copper
Top Layer:
  rectangle net VBAT-VCC: 69.977,386.334 71.501,389.89
  region net VBAT-2: 74.214,364.733 72.344,366.603 71.356,365.615 73.226,363.745
  rectangle net VBAT-VCC: 123.825,373.634 125.857,375.031
  rectangle net VBAT-2: 72.898,389.509 76.327,391.414
Bottom Layer:
  rectangle net VBAT-VCC: 69.977,386.334 71.501,389.89
  region net VBAT-2: 74.214,364.733 72.344,366.603 71.356,365.615 73.226,363.745
  rectangle net VBAT-VCC: 123.825,373.634 125.857,375.031
  rectangle net VBAT-2: 72.898,389.509 76.327,391.414

## Silkscreen, mask and mechanical layers (free items; w line width, h text height)
Top Overlay:
  circle w0.013: c101.799,342.722 r3
  circle w0.013: c101.799,429.324 r3
  circle w0.013: c176.799,386.023 r3
  text "KZ-EC06-LED" at 119.003,401.482 h3.81
  text "VER1.2" at 118.872,398.674 h2.54
  text "P02" at 65.279,382.919 h1.52
  text "P03" at 65.279,381.014 h1.52
  text "P10" at 65.279,379.109 h1.52
  text "P11" at 65.279,377.095 h1.52
  text "VCC" at 64.924,370.981 h1.52
  text "GND" at 66.803,367.298 h1.52
Mechanical 1:
  circle w0.013: c176.799,386.023 r1.6
  circle w0.013: c101.799,429.324 r1.6
  circle w0.013: c68.228,373.023 r0.4
  circle w0.013: c68.228,381.023 r0.4
  circle w0.013: c101.799,342.722 r1.6
  lines w0.013: 67.978,368.773 68.478,368.773 68.478,369.273 67.978,369.273 67.978,368.773 ; 67.978,370.773 68.478,370.773 68.478,371.273 67.978,371.273 67.978,370.773 ; 67.978,372.773 68.478,372.773 68.478,373.273 67.978,373.273 67.978,372.773 ; 67.978,374.773 68.478,374.773 68.478,375.273 67.978,375.273 67.978,374.773 ; 67.978,376.773 68.478,376.773 68.478,377.273 67.978,377.273 67.978,376.773 ; 67.978,378.773 68.478,378.773 68.478,379.273 67.978,379.273 67.978,378.773 ; 67.978,380.773 68.478,380.773 68.478,381.273 67.978,381.273 67.978,380.773 ; 67.978,382.773 68.478,382.773 68.478,383.273 67.978,383.273 67.978,382.773 ; 68.228,368.623 cw(c68.228,369.023) 68.228,369.423 cw(c68.228,369.023) 68.228,368.623 ; 68.228,370.623 cw(c68.228,371.023) 68.228,371.423 cw(c68.228,371.023) 68.228,370.623 ; 68.228,374.623 cw(c68.228,375.023) 68.228,375.423 cw(c68.228,375.023) 68.228,374.623 ; 68.228,376.623 cw(c68.228,377.023) 68.228,377.423 cw(c68.228,377.023) 68.228,376.623 ; 68.228,378.623 cw(c68.228,379.023) 68.228,379.423 cw(c68.228,379.023) 68.228,378.623 ; 68.228,382.623 cw(c68.228,383.023) 68.228,383.423 cw(c68.228,383.023) 68.228,382.623 ; 105.232,376.335 cw(c107.053,374.623) 107.625,372.189 cw(c92.071,365.973) 105.232,376.335 ; 105.232,395.711 ccw(c107.053,397.423) 107.625,399.857 ccw(c92.071,406.073) 105.232,395.711 ; 124.405,362.501 cw(c126.799,363.223) 129.192,362.501 cw(c126.799,345.923) 124.405,362.501 ; 124.405,409.545 ccw(c126.799,408.823) 129.192,409.545 ccw(c126.799,426.123) 124.405,409.545 ; 145.973,372.189 cw(c146.544,374.623) 148.366,376.335 cw(c161.526,365.973) 145.973,372.189 ; 145.973,399.857 ccw(c146.544,397.423) 148.366,395.711 ccw(c161.526,406.073) 145.973,399.857
  lines w0.254: 105.232,376.335 cw(c107.053,374.623) 107.625,372.189 cw(c92.071,365.973) 105.232,376.335 ; 105.232,376.335 105.232,376.335 ; 107.625,399.857 cw(c107.053,397.423) 105.232,395.711 cw(c92.071,406.073) 107.625,399.857 ; 107.625,399.857 107.625,399.857 ; 145.973,399.857 cw(c161.526,406.073) 148.366,395.711 cw(c146.544,397.423) 145.973,399.857 ; 145.973,399.857 145.973,399.857 ; 148.366,376.335 cw(c161.526,365.973) 145.973,372.189 cw(c146.544,374.623) 148.366,376.335 ; 148.366,376.335 148.366,376.335 ; 61.799,386.023 cw(c126.799,386.023) 126.799,451.023 cw(c126.799,386.023) 191.799,386.023 cw(c126.799,386.023) 126.799,321.023 cw(c126.799,386.023) 61.799,386.023 ; 100.199,342.722 ccw(c101.799,342.722) 101.799,341.122 ccw(c101.799,342.722) 103.399,342.722 ccw(c101.799,342.722) 101.799,344.322 ccw(c101.799,342.722) 100.199,342.722 ; 100.199,429.324 cw(c101.799,429.324) 101.799,430.924 cw(c101.799,429.324) 103.399,429.324 cw(c101.799,429.324) 101.799,427.724 cw(c101.799,429.324) 100.199,429.324 ; 124.405,362.501 cw(c126.799,363.223) 129.192,362.501 cw(c126.799,345.923) 124.405,362.501 ; 124.405,409.545 ccw(c126.799,408.823) 129.192,409.545 ccw(c126.799,426.123) 124.405,409.545 ; 175.199,386.023 cw(c176.799,386.023) 176.799,387.623 cw(c176.799,386.023) 178.399,386.023 cw(c176.799,386.023) 176.799,384.423 cw(c176.799,386.023) 175.199,386.023